# Altium PCB Teensy Troller.PcbDoc
Units mil, origin at the board's own origin, x right, y up, seen from the top; angles counter-clockwise.
Board outline 5602.23 x 4205.03 mil, 2 copper layers (Top Layer, Bottom Layer); 50 components, 50 nets, 258 pads, 37 vias.
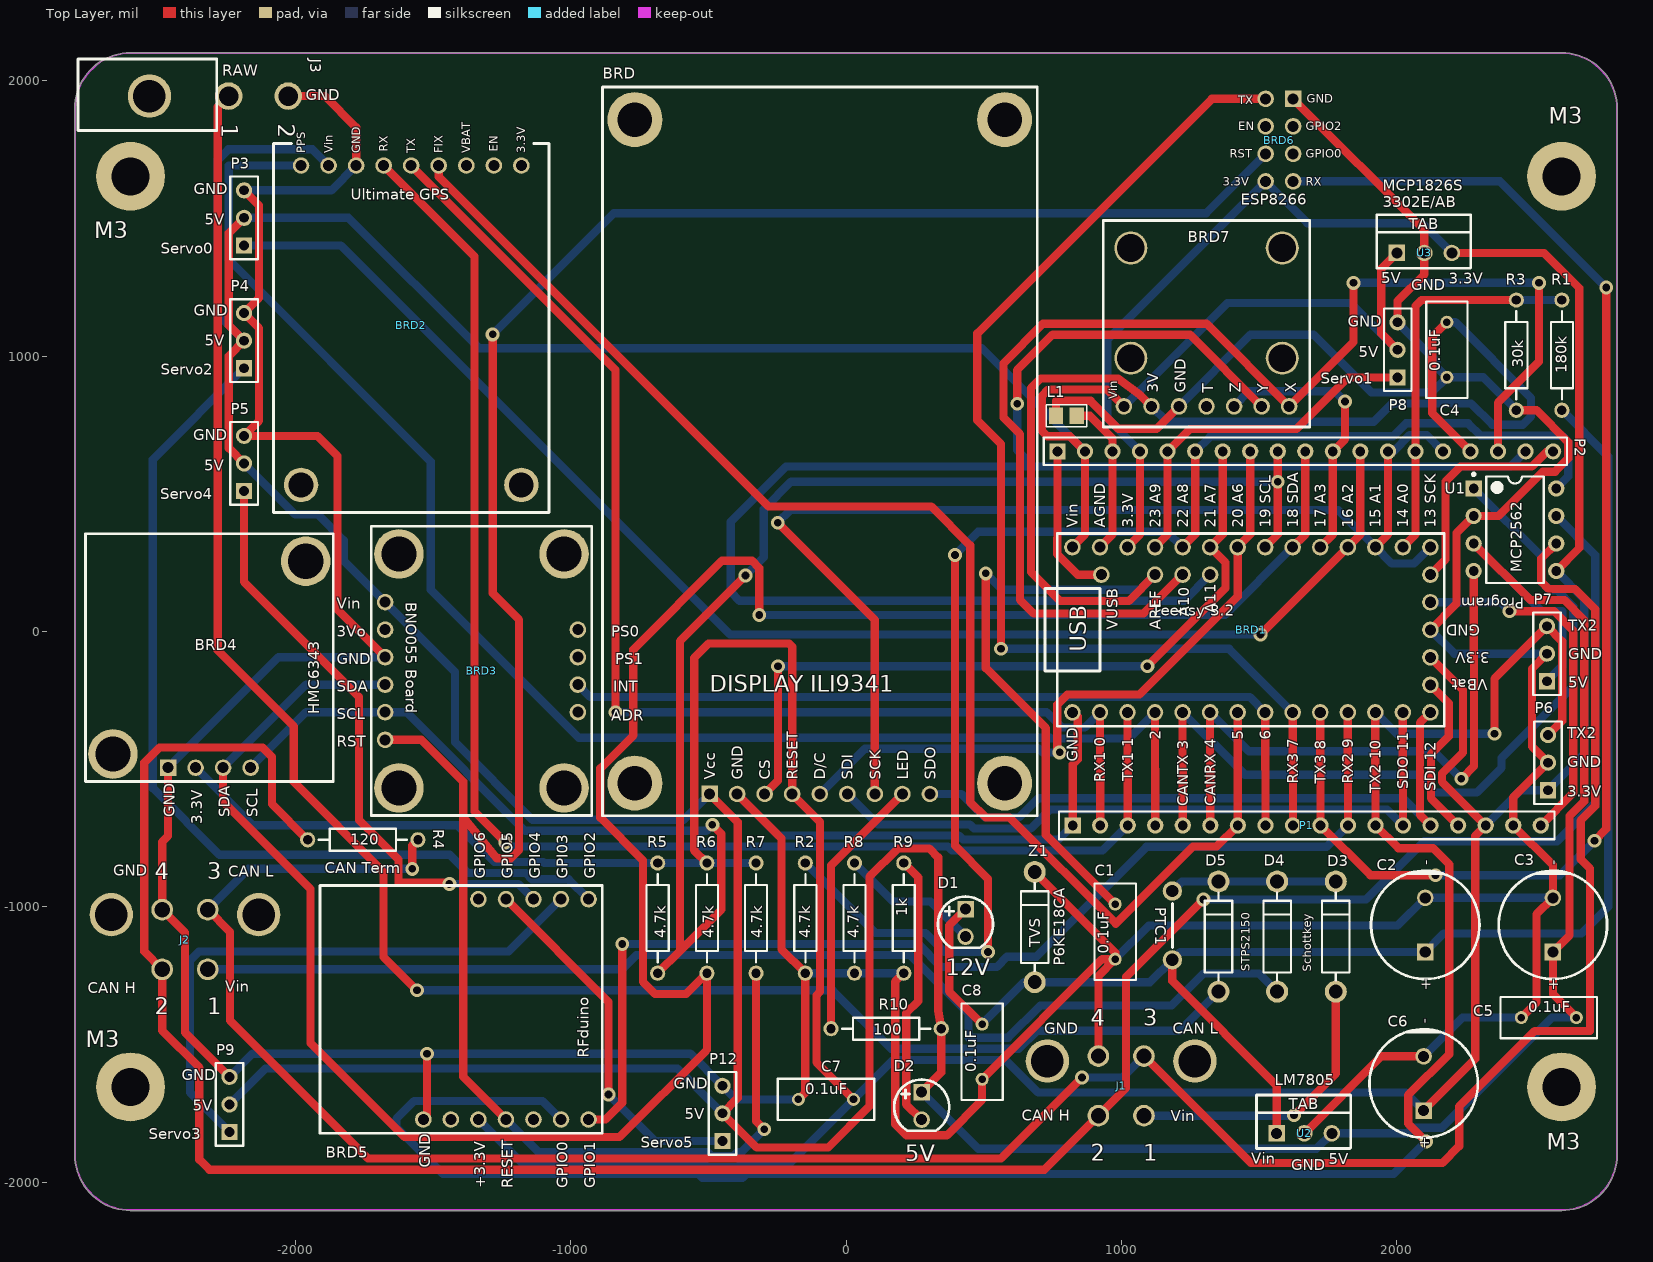
[diagram p0: Top Layer view]
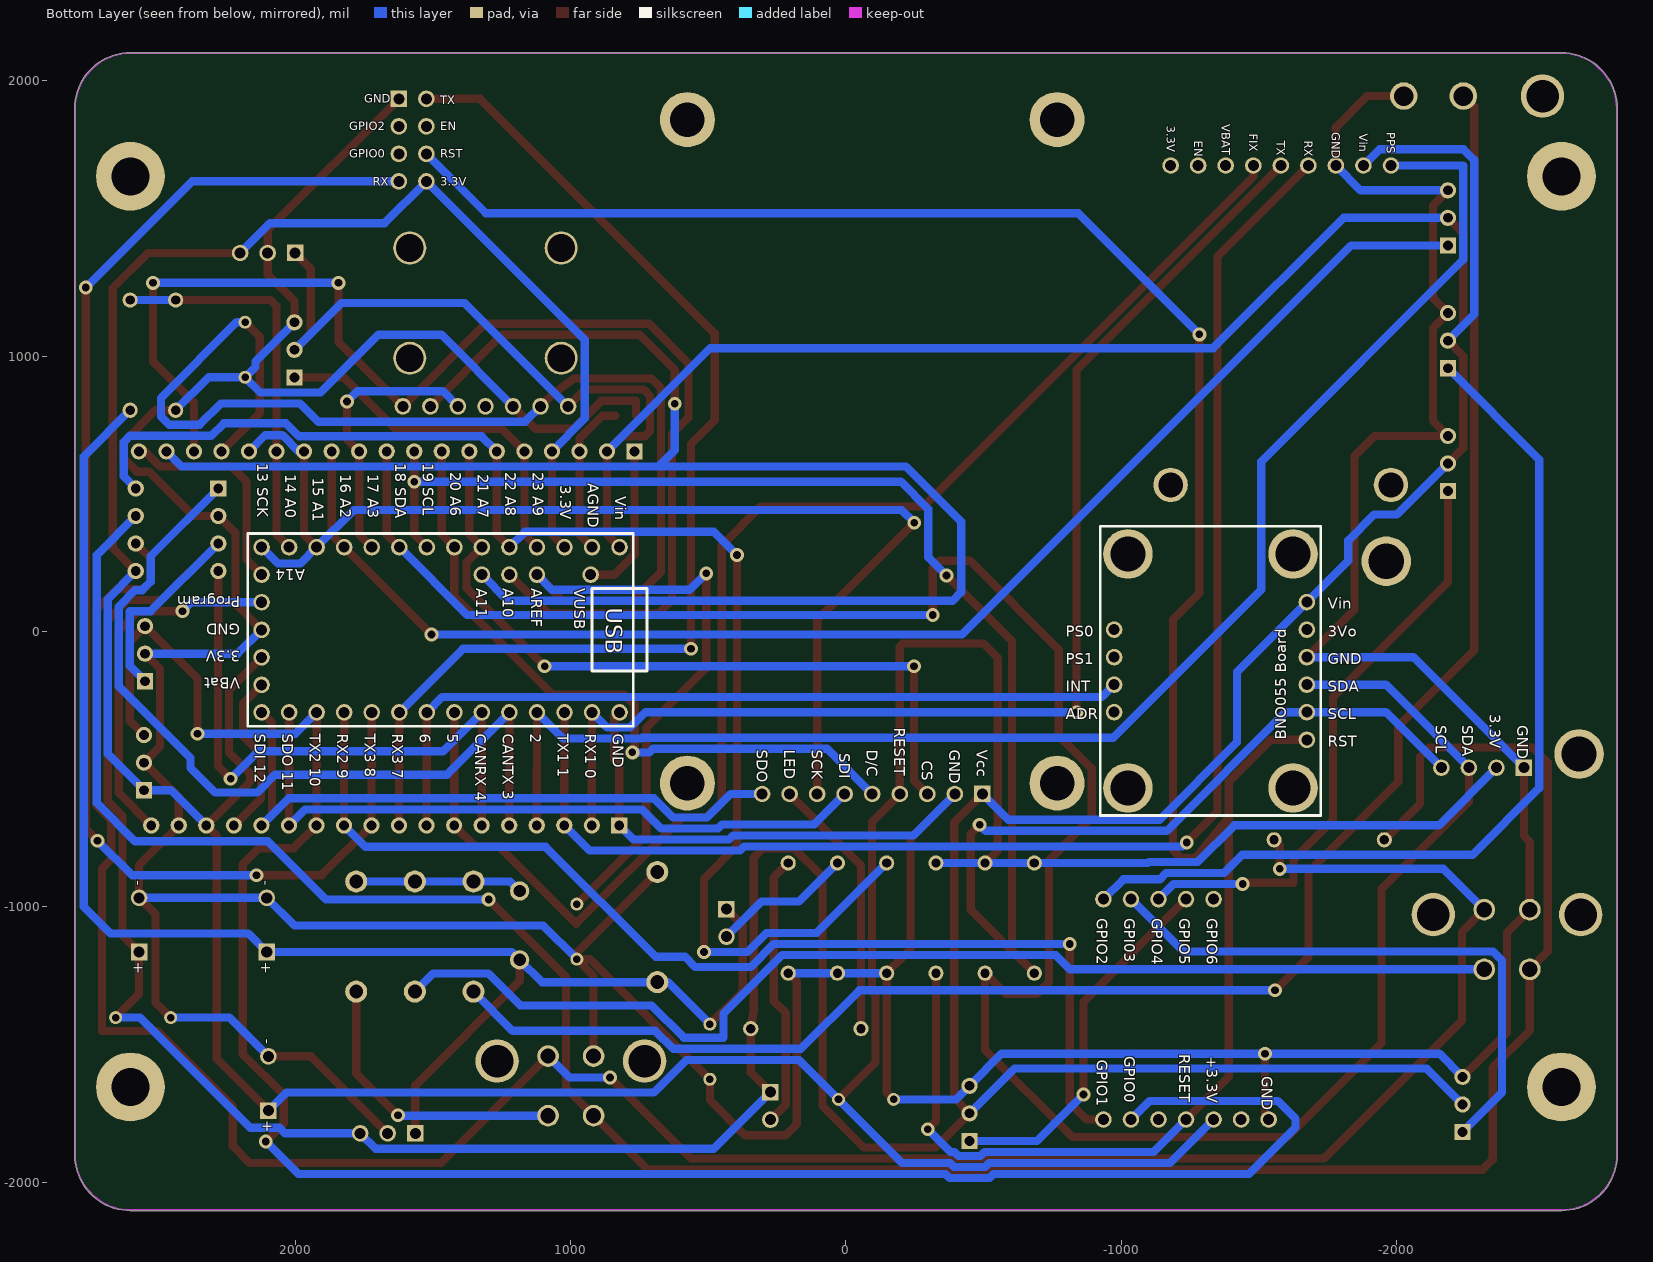
[diagram p1: Bottom Layer view, seen from below]

## Layer stack, top to bottom
Top Solder: solder mask 0.4, Solder Resist, Dk 3.5
Top Layer: signal copper 1.4
Dielectric 1: dielectric 12.6, FR-4, Dk 4.8
Bottom Layer: signal copper 1.4
Bottom Solder: solder mask 0.4, Solder Resist, Dk 3.5

## Board outline
-2801.29,-1900 cw(c-2798.78,-1900) -2801.18,-1899.24 -2801.18,1432.09 cw(c-2798.66,1432.09) -2800.82,1433.37 -2800.82,1899.24 cw(c-2798.43,1900) -2800.94,1900 cw(c-2598.43,1900) -2598.48,2102.51 cw(c-2598.43,1900) -2598.43,2102.51 -2598.43,2102.52 2598.42,2102.52 cw(c2598.42,2100) 2598.48,2102.51 cw(c2598.43,1900) 2800.94,1900 cw(c2798.43,1900) 2800.82,1899.24 2800.82,-1899.24 cw(c2798.43,-1900) 2800.94,-1900 cw(c2598.43,-1900) 2598.43,-2102.51 cw(c2598.43,-2100) 2598.37,-2102.51 -2598.43,-2102.51 cw(c-2598.43,-2100) -2598.6,-2102.51 cw(c-2598.78,-2100) -2598.78,-2102.51 cw(c-2598.78,-1900)

## Design rules (kind name [scope] priority, off if disabled: settings)
Clearance [All] p1: gap=10
HoleSize [All] p1: absolutevalues=TRUE maxlimit=250 minlimit=1 maxpercent=80.000 minpercent=20.000
PolygonConnect [All] p1: connectstyle=Relief reliefconductorwidth=10 reliefentries=4 polygonreliefangle="90 Angle" airgapwidth=10
RoutingVias [All] p1: holewidth=28 width=50 viastyle="Through Hole" minholewidth=28 minwidth=50 maxholewidth=28 maxwidth=50
SilkToSilkClearance [All] p1: silktosilkclearance=1
SolderMaskExpansion [All] p1: expansion=4
Width [All] p1: maxlimit=50 minlimit=20 preferedwidth=30
28 further rules are at their usual default settings.

## Components (designator, comment, footprint, x,y, rotation, side; value= is the part's Value field where it differs from the comment)
BRD "DISPLAY ILI9341" "Display ILI9341" -884.84,-668.31 r0 top
BRD1 "Teensy 3.2" Teensy 2122.05,-293.31 r90 top
BRD2 "Adafruit Ultimate GPS" GPS -1179.13,1772.64 r90 top
BRD3 "BNO055 IMU" "BNO055 Board" -1323.82,-142.72 r270 top
BRD4 "HMC6343 Compass" HMC6343 -1862.2,-544.29 r90 top
BRD5 "RFD22102" "Simblee RFduino Adapter" -935.04,-1771.65 r90 top
BRD6 "ESP8266" ESP8266 1523.62,1935.04 r0 top
BRD7 "AXDL377" "AXDL377 Breakout" 934.06,743.11 r0 top
C1 "0.1uF" RAD-0.2 977.36,-1089.57 r90 top
C2 "330uF" "Elec. Cap 5 x 10mm" 2103.35,-1163.39 r90 top
C3 "330uF" "Elec. Cap 5 x 10mm" 2566.93,-1163.39 r90 top
C4 "0.1uF" RAD-0.2 2182.09,1023.62 r90 top
C5 "0.1uF" RAD-0.2 2552.17,-1401.57 r0 top
C6 "330uF" "Elec. Cap 5 x 10mm" 2097.44,-1739.17 r90 top
C7 "0.1uF" RAD-0.2 -72.83,-1698.82 r0 top
C8 "0.1uF" RAD-0.2 494.09,-1525.59 r90 top
D1 "Green" "5mm Rad LED" 435.04,-1060.04 r0 top
D2 "Red" "5mm Rad LED" 275.59,-1724.41 r0 top
D3 "RK 16V1" DIODE-0.4 1778.54,-1107.28 r90 top
D4 "RK 16V1" DIODE-0.4 1565.45,-1107.28 r90 top
D5 "RK 16V1" DIODE-0.4 1352.36,-1107.28 r90 top
J1 "4 Pos Mini-Fit Jr." "4 POS Vertical MINI-FIT JR" 999.02,-1541.34 r0 top
J2 "4 Pos Mini-Fit Jr." "4 POS Vertical MINI-FIT JR" -2400.59,-1009.84 r0 top
J3 "39-30-1020" "2 pos Mini-Fit Jr. R/A Header" -2242.13,1944.88 r270 top
L1 "80 Ohms" 0805 798.23,783.46 r0 top
P1 "DNP" HDR1X18 822.83,-703.74 r0 top
P2 "DNP" HDR1X19 767.72,654.53 r0 top
P3 "DNP" HDR1X3 -2186.02,1402.56 r90 top
P4 "DNP" HDR1X3 -2186.02,956.69 r90 top
P5 "DNP" HDR1X3 -2186.02,510.83 r90 top
P6 "DNP" HDR1X3 2549.21,-575.79 r90 top
P7 "DNP" HDR1X3 2545.28,-180.12 r90 top
P8 "DNP" HDR1X3 2002.95,923.23 r90 top
P9 "DNP" HDR1X3 -2239.17,-1816.93 r90 top
P12 "DNP" HDR1X3 -448.82,-1849.41 r90 top
PTC1 "0.9 Amp POLYFUSE" PTC 1185.04,-1066.93 r270 top
R1 "180k" Axial-0.4 2599.41,1003.94 r90 top
R2 "4.7k" Axial-0.4 -147.84,-1040.36 r90 top
R3 "30k" Axial-0.4 2434.06,1003.94 r90 top
R4 "120" Axial-0.4 -1754.92,-755.91 r0 top
R5 "4.7k" Axial-0.4 -684.07,-1040.36 r90 top
R6 "4.7k" Axial-0.4 -505.32,-1040.36 r90 top
R7 "4.7k" Axial-0.4 -326.58,-1040.36 r90 top
R8 "4.7k" Axial-0.4 30.9,-1040.36 r90 top
R9 "1k" Axial-0.4 209.65,-1040.35 r90 top
R10 "100" Axial-0.4 145.67,-1441.93 r0 top
U1 "MCP2562" PDIP300-P8 2429.13,370.08 r0 top
U2 "OKI-78SR" 78xx 1563.98,-1821.85 r0 top
U3 "MCP1826S" 78xx 2000,1375 r0 top
Z1 "SMA6J" DIODE-0.4 685.04,-1072.83 r90 top

## Footprints (in the part's own frame and the unit in brackets; to place one, negate y for a bottom-side part, rotate by r counter-clockwise, add the part's x,y. Pads: shape width x height; smd on the part's side, far side on the other; paste and mask are expansions set on the pad)
"2 pos Mini-Fit Jr. R/A Header" [mm] "Molex 2 position Mini-Fit Jr. Right Angle Header with Pegs, Series 5569"
  round 4 hole 3: 0(0,-7.3)
  round 2.54 hole 1.803: 1(0,0) 2(0,5.5)
  silkscreen extent -3.43,-13.9 3.17,-1.1
"4 POS Vertical MINI-FIT JR" [mm] "Vertical Header"
  round 4 hole 3: 0(-6.8,-0.46) 0(6.8,-0.46)
  round 2 hole 1.4: 1(2.1,-5.5) 2(-2.1,-5.5) 3(2.1,0) 4(-2.1,0)
"5mm Rad LED" [mil]
  rect 60x60 hole 40: 1(-1.11,52.05)
  round 60 hole 40: 2(-1.11,-47.95)
  silkscreen extent -101,-88 99,98
78xx [mil] "Voltage regulator based on LM7805"
  rect 60x60 hole 40: 1(0,0)
  round 60 hole 40: 2(100,0) 3(200,0)
  silkscreen extent -73,-55 269,139
0805 [mm]
  rect 1.3x1.5 smd: 1(-0.899,0) 2(1.001,0)
  silkscreen extent -1.8,-1.02 1.9,1.02
"AXDL377 Breakout" [mil] "Adafruit ADXL377 - High-G Triple-Axis Accelerometer (+-200g Analog Out)"
  round 120 hole 100: 0(100,250) 0(100,650) 0(650,250) 0(650,650)
  round 60 hole 40: 1(75,75) 2(175,75) 3(275,75) 4(375,75) 5(475,75) 6(575,75) 7(675,75)
  silkscreen extent 0,0 750,750
Axial-0.4 [mm] "Axial Device, Thru-Hole; 2 Leads; 0.4 in Pin Spacing"
  round 1.4 hole 0.85: 1(-5.08,0) 2(5.08,0)
  silkscreen extent -4.06,-1.02 4.06,1.02
"BNO055 Board" [mil] "Adafruit Breakout Board for the BOSCH Sensortec BNO055"
  round 180 hole 128: 0(-425,300) 0(-425,-300) 0(425,300) 0(425,-300)
  round 60 hole 40: 1(-250,-350) 2(-150,-350) 3(-50,-350) 4(50,-350) 5(150,-350) 6(250,-350) 7(-150,350) 8(-50,350) 9(50,350) 10(150,350)
  silkscreen extent -525,-400 525,400
DIODE-0.4 [mil] "Diode, Thru-Hole; 2 Leads; 0.4 in Pin Spacing"
  round 80 hole 50: 1(-200,0) 2(200,0)
  silkscreen extent -160,-50 160,50
"Display ILI9341" [mil] "Color 320x240 Display, 2.2 inch, ILI9341 Controller,https://www.pjrc.com/store/display_ili9341.html"
  round 200 hole 125: 0(118.11,118.11) 0(118.11,2527.56) 0(1460.63,118.11) 0(1460.63,2527.56)
  rect 60x60 hole 40: 1(389.37,78.74)
  round 60 hole 40: 2(489.37,78.74) 3(589.37,78.74) 4(689.37,78.74) 5(789.37,78.74) 6(889.37,78.74) 7(989.37,78.74) 8(1089.37,78.74) 9(1189.37,78.74)
  silkscreen extent 0,0 1579,2646
"Elec. Cap 5 x 10mm" [mil] "2 lead polarized Radial Capacitor with 5 mm lead spacing and 10 mm diameter can"
  rect 60x60 hole 40: 1(0,0)
  round 60 hole 40: 2(196.85,0)
  silkscreen extent -98,-197 295,197
ESP8266 [mil] "WiFi Module - ESP8266 Sparkfun"
  rect 60x60 hole 40: 1(100,0)
  round 60 hole 40: 2(0,0) 3(100,-100) 4(0,-100) 5(100,-200) 6(0,-200) 7(100,-300) 8(0,-300)
GPS [mil] "Adafruit Ultimate GPS Breakout"
  round 125 hole 90: 0(-1240,0) 0(-1240,800)
  round 60 hole 40: 1(-80,0) 2(-80,100) 3(-80,200) 4(-80,300) 5(-80,400) 6(-80,500) 7(-80,600) 8(-80,700) 9(-80,800)
  silkscreen extent -1340,-100 0,900
HDR1X3 [mm] "Connector; Header; 3 Position"
  rect 1.5x1.5 hole 0.9: 1(0,0)
  round 1.5 hole 0.9: 2(2.54,0) 3(5.08,0)
  silkscreen extent -1.27,-1.27 6.35,1.27
HDR1X18 [mm] "Connector; Header; 18 Position"
  rect 1.5x1.5 hole 0.9: 1(0,0)
  round 1.5 hole 0.9: 2(2.54,0) 3(5.08,0) 4(7.62,0) 5(10.16,0) 6(12.7,0) 7(15.24,0) 8(17.78,0) 9(20.32,0) 10(22.86,0) 11(25.4,0) 12(27.94,0) 13(30.48,0) 14(33.02,0) 15(35.56,0) 16(38.1,0) 17(40.64,0) 18(43.18,0)
  silkscreen extent -1.27,-1.27 44.45,1.27
HDR1X19 [mm] "Connector; Header; 19 Position"
  rect 1.5x1.5 hole 0.9: 1(0,0)
  round 1.5 hole 0.9: 2(2.54,0) 3(5.08,0) 4(7.62,0) 5(10.16,0) 6(12.7,0) 7(15.24,0) 8(17.78,0) 9(20.32,0) 10(22.86,0) 11(25.4,0) 12(27.94,0) 13(30.48,0) 14(33.02,0) 15(35.56,0) 16(38.1,0) 17(40.64,0) 18(43.18,0) 19(45.72,0)
  silkscreen extent -1.27,-1.27 46.99,1.27
HMC6343 [mil] "SparkFun HMC6343 Breakout  SEN-12916"
  round 180 hole 128: 0(100,800) 0(800,100)
  rect 60x60 hole 40: 1(50,600)
  round 60 hole 40: 2(50,500) 3(50,400) 4(50,300)
  silkscreen extent 0,0 900,900
PDIP300-P8 [mm] "DIP, 8-Leads, Row Spacing 7.62mm, Pitch 2.54mm, Body 9.5x6.6mm"
  rect 1.5x1.5 hole 0.9: 1(-3.81,3.81)
  round 1.5 hole 0.9: 2(-3.81,1.27) 3(-3.81,-1.27) 4(-3.81,-3.81) 5(3.81,-3.81) 6(3.81,-1.27) 7(3.81,1.27) 8(3.81,3.81)
  silkscreen extent -3.93,-4.9 2.65,5.23, body extent -3.55,-4.9 3.55,4.9, height 4.32
PTC [mil] "TE RGEF600-2"
  round 70 hole 45: 1(-125,0) 2(125,0)
  silkscreen extent -80,0 80,0
RAD-0.2 [mm] "Radial Cap, Thru-Hole; 2 Leads; 0.2 in Pin Spacing"
  round 1.2 hole 0.7: 1(-2.54,0) 2(2.54,0)
  silkscreen extent -4.44,-1.9 4.45,1.91
"Simblee RFduino Adapter" [mil] "Bluetooth / 802.15.1 Development Tools RFduino BLE 4.0 DIP (Arduino-Compatible)"
  round 60 hole 40: 1(0,0) 2(0,100) 3(0,200) 4(0,300) 5(0,400) 6(0,500) 7(0,600) 8(800,0) 9(800,100) 10(800,200) 11(800,300) 12(800,400)
  silkscreen extent -50,-50 850,975
Teensy [mil] "32 bit Arduino Compatible Microcontroller www.pjrc.com/teensy"
  round 60 hole 40: 1(0,0) 2(0,100) 3(0,200) 4(0,300) 5(0,400) 6(0,500) 7(0,600) 8(0,700) 9(0,800) 10(0,900) 11(0,1000) 12(0,1100) 13(0,1200) 14(0,1300) 15(100,0) 16(200,0) 17(300,0) 18(400,0) 19(500,0) 20(600,0) 21(600,100) 22(600,200) 23(600,300) 24(600,400) 25(600,500) 26(600,600) 27(600,700) 28(600,800) 29(600,900) 30(600,1000) 31(600,1100) 32(600,1200) 33(600,1300) 34(500,1195) 35(500,1000) 36(500,900) 37(500,800)
  silkscreen extent -50,-50 650,1400

## Part data
BRD: library part Display, "Color 320x240 Display, 2.2 inch, ILI9341 Controller https://www.pjrc.com/store/display_ili9341.html"
BRD1: library part Teensy, "32 Bit Arduino-Compatible Microcontroller"
BRD2: library part "GPS - Adafruit"
BRD3: library part "BNO055 Board", "Adafruit BNO055 Sensor Breakout Board"
BRD4: library part HMC6343, "SparkFun HMC6343 Breakout  SEN-12916"
BRD5: library part "Simblee Adapter", "Bluetooth / 802.15.1 Development Tools RFduino BLE 4.0 DIP (Arduino-Compatible)"
BRD6: "Sparkfun ESP8266 Module (WRL-13678)"
BRD7: library part "AXDL377 Breakout", "Adafruit ADXL377 - High-G Triple-Axis Accelerometer (+-200g Analog Out)"
C1 C4 C5 C7 C8: library part Cap, "CAP CER 0.1UF 50V 10% X7R 0603"
C2 C3 C6: library part "SMD Elec", "CAP ALUM 330UF 20% 50V RADIAL"
D1: library part "LED - Green", "LED GREEN DIFFUSED 0805 SMD"
D2: library part "LED - SMD", "LED RED DIFFUSED 0805 SMD"
D3 D4 D5: library part "Schottky Diode", "DIODE SCHOTTKY 60V 2A AXIAL"
J1 J2: library part "4 Pos Header Vert", "CONN HEADER 4POS 4.2MM VERT TIN"
J3: library part "2 Pos Header"
L1: library part "Ferrite Bead", "Ferrite Bead 80ohms 100MHz 5A Monolithic 0805 SMD"
P1: library part "Header 18", "Header, 18-Pin"
P2: library part "Header 19", "Header, 19-Pin"
P3 P4 P5 P6 P7 P8 P9 P12: library part "Header 3", "Header, 3-Pin"
PTC1: library part PTC, "Resettable Fuses - PPTC 60V POLYFUSE .900A RADIAL LEADS"
R1 R3 R4 R8 R9 R10: library part "Chip Resistor", "RES SMD 1K OHM 1% 1/10W 0603"
R2 R5 R6 R7: library part "Chip Resistor", "RES SMD 4.7K OHM 1% 1/8W 0805"
U1: library part MCP2551-I/P, "High-Speed CAN Transceiver, 8-Pin PDIP, Industrial Temperature"
U2: library part 7805, "5V DC/DC Converter (7805 replacement)"
U3: library part 7805, "LDO Voltage Regulators 1A CMOS LDO Vout 3.3V ETR"
Z1: library part "Zener - Bidirectional", "TVS DIODE 15VWM 24.4VC SMA"

## Free pads (board coordinates)
  round 250 hole 137.8: 0(-2598.43,-1653.54) 0(-2598.43,1653.54) 0(2598.42,-1653.54) 0(2598.42,1653.54)

## Via types
v1: diameter 50, hole 28, Top Layer to Bottom Layer, 37 vias

## Nets (pads, with @x,y where several pads share a name; then routed paths per layer and width w, separated by ;. In a path a pad name is that pad's centre, name@x,y a point inside that pad or via, vN(x,y) a via of type N, cw(c..) or ccw(c..) an arc to the next point about the centre after c; other vN are vias at no path point)
3V3: BRD1.16 BRD1.31 BRD4.2 BRD5.5 BRD6.8 BRD.4 C6.1 C7.2 P1.16 P2.4 P6.1 R5.2 R6.2 R7.2 U1.5 U3.3 | length 15866.1
  Top Layer w30: R6.2 -551.43,-794.26 -551.43,-95.54 -499.43,-43.54 -206.43,-43.54 -195.47,-54.5 BRD.4 -94.43,-690.62 -94.43,-1307.54 -107.43,-1320.54 -107.43,-1564.23 C7.2 ; BRD1.31 1067.71,352.36 P2.4 ; C6.1 2284.57,-1552.04 2284.57,-742 P1.16 2164.57,-545.48 2164.57,-514.54 2240.32,-438.8 2240.32,-211.58 BRD1.16 ; U3.3 2535.03,1375 2662.57,1247.46 2662.57,303.52 U1.5
  Bottom Layer w30: BRD4.2 -2153.15,-703.35 -1410.43,-703.35 -1277.12,-836.65 -1100.04,-836.65 -1096.34,-840.36 R5.2 R6.2 R7.2 ; BRD5.5 -1177.15,-1929.54 -519.66,-1929.54 -505.27,-1943.94 -392.37,-1943.94 -377.97,-1929.54 -203.56,-1929.54 C7.2 170.44,-1555.54 579.57,-1555.54 697.57,-1673.54 2031.81,-1673.54 C6.1 ; P2.4 948.57,773.67 948.57,1059.99 BRD6.8 1675.21,1483.46 2091.54,1483.46 U3.3 ; P1.16 2450.79,-575.79 P6.1 2680.57,-444.42 2680.57,118.64 U1.5
5V0: BRD1.33 BRD2.8 BRD3.1 BRD7.1 BRD.1 C3.1 C5.2 D2.1 P2.2 P3.2 P4.2 P5.2 P7.1 P8.2 P9.2 P12.2 R10.2 U1.3 U2.3 U3.1 | length 21828.4
  Top Layer w30: P5.2 -2241.43,666.23 -2241.43,1001.29 P4.2 -2241.43,1112.09 -2241.43,1447.16 P3.2 ; BRD.1 -393.43,-691.62 -393.43,-1694.02 P12.2 -324.49,-1873.74 -64.62,-1873.74 85.57,-1723.54 85.57,-890.05 188.08,-787.54 302.57,-787.54 334.57,-819.54 334.57,-1376.54 R10.2 345.67,-1601.16 D2.1 ; BRD1.33 867.71,352.36 P2.2 813.19,709.05 730.98,709.05 711.57,728.46 711.57,856.46 734.04,878.92 948.24,878.92 BRD7.1 ; U3.1 1943.57,1318.58 1943.57,1082.61 P8.2 ; U1.3 2484.8,114.41 2608.62,114.41 2680.57,42.46 2680.57,-616.92 2627.57,-669.92 2627.57,-1102.74 C3.1 2566.93,-1316.34 C5.2
  Bottom Layer w30: P9.2 -2108.79,-1586.54 -611.69,-1586.54 P12.2 ; P5.2 -2000.65,425.46 -1918.43,425.46 -1824.43,331.46 -1824.43,257.89 BRD3.1 -1420.43,-146.11 -1420.43,-401.54 -1138.43,-683.54 -589.45,-683.54 BRD.1 ; P4.2 -2281.43,1152.09 -2281.43,1713.46 -2243.43,1751.46 -1937.95,1751.46 BRD2.8 ; P3.2 -1806.53,1502.56 -1333.43,1029.46 492.78,1029.46 P2.2 ; D2.1 479.67,-1877.54 1708.28,-1877.54 U2.3 2036.59,-1821.85 2056.95,-1801.49 2163.63,-1801.49 2563.54,-1401.58 C5.2 ; BRD7.1 1384.4,1193.46 1832.72,1193.46 P8.2 ; U1.3 2524.8,74.41 2600.57,74.41 2600.57,-124.82 P7.1
12V0: C2.1 C8.2 D1.1 PTC1.2 R1.1 U2.1 Z1.1 | length 5601.7
  Top Layer w30: D1.1 374.57,-1067.34 374.57,-1306.07 C8.2 ; PTC1.2 1185.04,-1268.54 1563.98,-1647.48 U2.1
  Bottom Layer w30: C8.2 646.85,-1272.84 Z1.1 1104.13,-1272.84 PTC1.2 1213.58,-1163.39 C2.1 2170.19,-1096.54 2670.57,-1096.54 2767.57,-999.54 2767.57,635.77 R1.1
CAN1H: J1.2 J2.2 R4.1 U1.7 | length 9354
  Top Layer w30: R4.1 -2084.43,-626.4 -2084.43,-454.54 -2118.43,-420.54 -2493.43,-420.54 -2548.43,-475.54 -2548.43,-1161.22 J2.2 -2483.27,-1448.7 -2348.43,-1583.54 -2348.43,-1917.54 -2312.23,-1953.74 720.47,-1953.74 J1.2 1016.57,-1657.64 1016.57,-1253.54 v1(1297.57,-972.54)
  Bottom Layer w30: v1(1297.57,-972.54) 1888.57,-972.54 2099.57,-761.54 2581.57,-761.54 2720.57,-622.54 2720.57,278.64 U1.7
CAN1L: J1.3 J2.3 R4.2 U1.6 | length 9065.2
  Top Layer w30: J2.3 -2237.43,-1090.33 -2237.43,-1412.54 -1736.23,-1913.74 562.38,-1913.74 v1(856.57,-1619.54) ; v1(-1575.43,-861.54) -1575.43,-776.41 R4.2 ; J1.3 1469.9,-1929.54 2165.57,-1929.54 2226.57,-1868.54 2226.57,-1724.54 2500.57,-1450.54 2701.57,-1450.54 2701.57,-860.54 2667.57,-826.54 2667.57,-686.49 2720.57,-633.49 2720.57,81.46 2647.57,154.46 2551.57,154.46 2524.57,181.46 2524.57,265.52 U1.6
  Bottom Layer w30: J2.3 -2169.62,-861.54 v1(-1575.43,-861.54) ; v1(856.57,-1619.54) 1003.49,-1619.54 J1.3
GND: BRD1.14 BRD1.17 BRD2.7 BRD3.3 BRD4.1 BRD5.7 BRD6.1 BRD7.3 BRD.2 C1.1 C2.2 C3.2 C4.1 C5.1 C6.2 C7.1 C8.1 J1.4 J2.4 J3.2 L1.1 P1.1 P1.17 P3.3 P4.3 P5.3 P6.2 P7.2 P8.3 P9.3 P12.3 R2.1 R3.1 R8.1 R9.1 U1.2 U2.2 U3.2 Z1.2 | length 22686.1
  Top Layer w30: BRD4.1 -2462.21,-742.48 -2483.27,-763.54 J2.4 -2400.43,-1092.68 -2400.43,-1455.68 P9.3 ; P3.3 -2131.43,1547.96 -2131.43,1211.29 P4.3 -2131.43,1102.09 -2131.43,765.42 P5.3 -1919.8,710.83 -1846.43,637.46 -1846.43,79.89 BRD3.3 ; J3.2 -1892.56,1944.88 -1779.13,1831.46 BRD2.7 ; BRD5.7 -1521.43,-1758.04 v1(-1521.43,-1532.54) ; BRD.2 -234.43,-750.62 -234.43,-1153.77 R2.1 -147.84,-1673.82 C7.1 ; R9.1 178.57,-1271.43 178.57,-1788.54 219.38,-1829.35 365.77,-1829.35 494.09,-1701.02 C8.1 930.12,-1189.57 C1.1 ; Z1.2 977.36,-1165.16 C1.1 ; L1.1 762.83,837.99 888.22,837.99 989.76,736.46 1127.4,736.46 BRD7.3 ; BRD1.14 822.05,-308.31 841.25,-308.31 841.25,-464.35 822.83,-482.77 P1.1 ; J1.4 916.34,-1250.59 C1.1 ; BRD6.1 2100,1458.66 U3.2 2100,1297.5 2002.95,1200.46 P8.3 ; U2.2 1943.5,-1542.32 C6.2 ; BRD1.17 2217.05,101.69 2217.05,357.99 U1.2 2369.39,420.08 2530.3,580.99 2575.11,580.99 2622.57,628.46 2622.57,688.46 2507.09,803.94 R3.1 ; C5.1 2507.57,-1346.17 2507.57,-1025.89 C3.2 2566.93,-847.83 P1.17 2422.83,-602.16 P6.2 2490.57,-417.15 2490.57,-134.82 P7.2
  Bottom Layer w30: BRD4.1 -2060.63,-92.72 BRD3.3 ; P9.3 -2154.79,-1532.54 v1(-1521.43,-1532.54) -565.69,-1532.54 P12.3 -399.41,-1698.82 C7.1 ; P3.3 -1869.21,1602.56 BRD2.7 ; BRD.2 -244.67,-740.37 409.57,-740.37 424.4,-755.2 771.38,-755.2 P1.1 ; R2.1 R8.1 R9.1 ; C1.1 1099.38,-1067.54 2002.34,-1067.54 C2.2 2334.57,-966.54 C3.2 ; BRD7.3 1469.05,1078.11 1697.92,1078.11 1907.57,868.46 2126.92,868.46 C4.1 ; P8.3 2144.41,981.77 2144.41,961.3 C4.1 ; C6.2 2238.19,-1401.58 C5.1 ; BRD1.17 2208.86,-80.12 P7.2 ; R3.1 2314.37,923.62 C4.1
NetBRD1_1: BRD1.1 BRD.9 P1.14 | length 2365.1
  Top Layer w30: BRD1.1 2084.57,-330.78 2084.57,-665.48 P1.14
  Bottom Layer w30: BRD.9 418.77,-589.57 504.4,-675.2 627.56,-675.2 697.22,-605.54 2024.64,-605.54 P1.14
NetBRD1_2: BRD1.2 BRD.6 P1.13 | length 2534.1
  Top Layer w30: BRD1.2 2022.05,-498.76 2022.83,-499.54 P1.13
  Bottom Layer w30: BRD.6 115.33,-700.37 449.57,-700.37 464.4,-715.2 671.13,-715.2 740.79,-645.54 1964.64,-645.54 P1.13
NetBRD1_3: BRD1.3 BRD5.2 P1.12 P6.3 P7.3 | length 7759.2
  Top Layer w30: BRD1.3 1922.05,-498.76 1922.83,-499.54 P1.12 2005.64,-786.54 2131.57,-786.54 2190.57,-845.54 2190.57,-1534.54 2041.57,-1683.54 2041.57,-1786.54 v1(2106.57,-1851.54) ; v1(2354.57,-370.54) 2354.57,-170.82 P7.3 2600.57,-35.42 2600.57,-324.42 P6.3
  Bottom Layer w30: BRD5.2 -1102.15,-1704.54 -1568.43,-1704.54 -1632.43,-1768.54 -1632.43,-1800.54 -1463.43,-1969.54 -536.23,-1969.54 -521.84,-1983.94 -375.8,-1983.94 -361.4,-1969.54 1988.57,-1969.54 v1(2106.57,-1851.54) ; BRD1.3 1999.28,-370.54 v1(2354.57,-370.54)
NetBRD1_4: BRD1.4 BRD5.1 P1.11 | length 4017.1
  Top Layer w30: BRD5.1 -873.54,-1771.65 -812.43,-1710.54 v1(-812.43,-1134.54) ; BRD1.4 1822.05,-498.76 1822.83,-499.54 P1.11
  Bottom Layer w30: v1(-812.43,-1134.54) 262.57,-1134.54 345.57,-1217.54 547.57,-1217.54 584.57,-1180.54 691.57,-1180.54 1090.57,-781.54 1745.03,-781.54 P1.11
NetBRD1_5: BRD1.5 BRD6.7 P1.10 | length 4855.6
  Top Layer w30: BRD1.5 1722.05,-498.76 1722.83,-499.54 P1.10 1903.64,-884.54 v1(2140.57,-884.54) ; v1(2717.57,-759.54) 2760.57,-716.54 v1(2760.57,1249.46)
  Bottom Layer w30: BRD6.7 2374.99,1635.04 v1(2760.57,1249.46) ; v1(2140.57,-884.54) 2592.57,-884.54 v1(2717.57,-759.54)
NetBRD1_6: BRD1.6 BRD6.2 P1.9 | length 4147.1
  Top Layer w30: v1(562.57,-62.54) 562.57,681.13 476.57,767.13 476.57,1083.23 1328.39,1935.04 BRD6.2 ; BRD1.6 1622.05,-498.76 1622.83,-499.54 P1.9
  Bottom Layer w30: v1(562.57,-62.54) 1391.28,-62.54 BRD1.6
NetBRD1_7: BRD1.7 BRD3.9 P1.8 | length 2948.3
  Top Layer w30: BRD1.7 1522.05,-498.76 1522.83,-499.54 P1.8
  Bottom Layer w30: BRD3.9 -928.99,-237.54 1466.28,-237.54 BRD1.7
NetBRD1_8: BRD1.8 BRD2.4 P1.7 | length 5170.5
  Top Layer w30: BRD2.4 -1479.13,1652.16 -281.21,454.24 309.79,454.24 450.79,313.24 450.79,-618.54 507.44,-675.2 594.23,-675.2 979.57,-1060.54 1259.57,-780.54 1346.03,-780.54 P1.7 1422.83,-499.54 1422.05,-498.76 BRD1.8
NetBRD1_9: BRD1.9 P1.6 U1.4 | length 2197.3
  Top Layer w30: BRD1.9 1322.05,-498.76 1322.83,-499.54 P1.6 ; v1(2234.57,-534.54) 2280.32,-488.8 2280.32,-74.29 2279.13,-73.1 U1.4
  Bottom Layer w30: BRD1.9 1463.28,-434.54 2134.57,-434.54 v1(2234.57,-534.54)
NetBRD1_10: BRD1.10 P1.5 U1.1 | length 3014.5
  Top Layer w30: BRD1.10 1222.05,-498.76 1222.83,-499.54 P1.5
  Bottom Layer w30: BRD1.10 1448.28,-519.54 2072.57,-519.54 2137.57,-584.54 2290.57,-584.54 2380.57,-494.54 2380.57,-458.74 2640.57,-198.74 2640.57,91.46 2581.57,150.46 2555.57,150.46 2524.57,181.46 2524.57,274.64 U1.1
NetBRD1_11: BRD1.11 BRD2.9 P1.4 | length 5410.6
  Top Layer w30: BRD1.11 1122.05,-498.76 1122.83,-499.54 P1.4
  Bottom Layer w30: BRD2.9 -2241.24,1692.64 -2241.43,1692.46 -2241.43,1350.46 -1508.43,617.46 -1508.43,152.46 -970.77,-385.2 740.79,-385.2 743.9,-388.31 1027.05,-388.31 BRD1.11
NetBRD1_12: BRD1.12 BRD2.6 P1.3 | length 5362.3
  Top Layer w30: BRD2.6 -1349.43,1362.93 -1349.43,-653.54 v1(-1237.43,-765.54) ; BRD1.12 1022.05,-498.76 1022.83,-499.54 P1.3
  Bottom Layer w30: v1(-1237.43,-765.54) -1222.6,-780.37 369.57,-780.37 384.4,-795.2 931.38,-795.2 P1.3
NetBRD1_13: BRD1.13 BRD2.5 P1.2 | length 4508.5
  Top Layer w30: BRD2.5 -837.43,950.93 v1(-837.43,-292.54) ; BRD1.13 922.05,-498.76 922.83,-499.54 P1.2
  Bottom Layer w30: v1(-837.43,-292.54) 728.13,-292.54 783.9,-348.31 867.05,-348.31 BRD1.13
NetBRD1_15: BRD1.15 P1.15 | length 605.2
  Top Layer w30: BRD1.15 2188.57,-259.84 2188.57,-380.54 2124.57,-444.54 2124.57,-605.48 P1.15
NetBRD1_18: BRD1.18 P1.18 | length 1317.8
  Top Layer w30: v1(2409.57,74.41) 2570.62,74.41 2640.57,4.46 2640.57,-586 P1.18
  Bottom Layer w30: BRD1.18 2377.29,106.69 v1(2409.57,74.41)
NetBRD1_19: BRD1.19 P2.19 | length 797.4
  Top Layer w30: BRD1.19 2177.05,261.69 2177.05,545.47 2231.57,600 2490.3,600 2544.83,654.53 P2.19
NetBRD1_20: BRD1.20 BRD1.22 BRD.7 P2.13 P2.15 | length 4241.4
  Top Layer w30: v1(-248.43,395.46) 104.53,42.5 BRD.7 ; BRD1.22 1967.71,352.36 P2.13
  Bottom Layer w30: v1(-248.43,395.46) -202.19,441.69 1787.05,441.69 BRD1.22 1981.28,247.46 2062.81,247.46 BRD1.20 ; P2.13 1987.64,654.53 2046.57,713.46 2108.78,713.46 P2.15
NetBRD1_21: BRD1.21 P2.14 R1.2 R3.2 | length 1435.1
  Top Layer w30: BRD1.21 2067.71,352.36 P2.14 2067.71,1182.08 2089.57,1203.94 R3.2
  Bottom Layer w30: R3.2 R1.2
NetBRD1_23: BRD1.23 P2.12 P3.1 | length 5091.5
  Top Layer w30: v1(1504.81,-10.54) BRD1.23 1867.71,352.36 P2.12
  Bottom Layer w30: P3.1 -1834.53,1402.56 -421.43,-10.54 v1(1504.81,-10.54)
NetBRD1_24: BRD1.24 BRD7.5 P2.11 | length 1006.7
  Top Layer w30: BRD1.24 1767.71,352.36 P2.11 1811.57,698.39 v1(1811.57,835.46)
  Bottom Layer w30: BRD7.5 1464.05,873.11 1773.92,873.11 v1(1811.57,835.46)
NetBRD1_25: BRD1.25 BRD3.4 BRD4.3 P2.10 R6.1 | length 8615.7
  Top Layer w30: BRD4.3 -2262.21,-616.76 -1944.43,-934.54 -1944.43,-1494.54 -1603.43,-1835.54 -822.43,-1835.54 -505.33,-1518.44 R6.1 -580.51,-1315.54 -693.43,-1315.54 -737.43,-1271.54 -737.43,-830.54 -892.43,-675.54 -892.43,-496.54 -772.43,-376.54 -772.43,-64.54 -450.43,257.46 -341.43,257.46 -315.43,231.46 v1(-315.43,60.46) ; BRD1.25 1667.71,352.36 P2.10
  Bottom Layer w30: BRD4.3 -1960.63,-192.72 BRD3.4 ; v1(-315.43,60.46) 1375.81,60.46 BRD1.25
NetBRD1_26: BRD1.26 BRD3.5 BRD4.4 P2.9 R5.1 | length 6601.4
  Top Layer w30: R5.1 -603.43,-1159.71 ; v1(-485.43,-701.54) -452.77,-734.2 -452.77,-1009.05 -603.43,-1159.71 ; v1(-365.43,203.46) -603.43,-34.54 -603.43,-1159.71 ; BRD1.26 1567.71,352.36 v1(1567.71,544.46) P2.9
  Bottom Layer w30: BRD4.4 -1960.63,-292.72 BRD3.5 -1596.25,-292.72 -1165.43,-723.54 -507.43,-723.54 v1(-485.43,-701.54) ; v1(-365.43,203.46) -298.43,270.46 -298.43,445.46 -199.43,544.46 v1(1567.71,544.46)
NetBRD1_27: BRD1.27 BRD.5 P2.8 | length 2485
  Top Layer w30: v1(775.57,-438.54) 767.05,-430.02 767.05,-265.07 803.42,-228.69 1065.42,-228.69 1422.05,127.93 BRD1.27 1467.71,352.36 P2.8
  Bottom Layer w30: BRD.5 68.9,-425.2 700.57,-425.2 713.92,-438.54 v1(775.57,-438.54)
NetBRD1_28: BRD1.28 BRD.3 P2.7 | length 2765
  Top Layer w30: BRD.3 -247.42,-541.52 v1(-247.42,-125.54) ; v1(1094.27,-125.54) 1377.57,157.76 1377.57,251.16 BRD1.28 1367.71,352.36 P2.7
  Bottom Layer w30: v1(-247.42,-125.54) v1(1094.27,-125.54)
NetBRD1_29: BRD1.29 P2.6 R2.2 U1.8 | length 5151.8
  Top Layer w30: v1(395.57,278.46) 395.57,-777.54 515.57,-897.54 v1(515.57,-1163.54) ; BRD1.29 1267.71,352.36 P2.6
  Bottom Layer w30: R2.2 106.35,-1094.54 288.57,-1094.54 357.57,-1163.54 v1(515.57,-1163.54) ; v1(395.57,278.46) 479.57,362.46 1166.28,362.46 BRD1.29 ; P2.6 1322.64,709.46 1986,709.46 2033.13,756.59 2259.21,756.59 2304.42,711.38 2599.65,711.38 2622.57,688.46 2622.57,563.52 U1.8
NetBRD1_30: BRD1.30 P2.5 P8.1 | length 1313.3
  Top Layer w30: BRD1.30 1167.71,352.36 P2.5 1248.64,735.46 1635.57,735.46 1823.35,923.23 P8.1
NetBRD1_32: BRD1.32 L1.2 P2.3 | length 578
  Top Layer w30: L1.2 886.18,783.46 967.71,701.93 P2.3 967.71,352.36 BRD1.32
NetBRD1_34: BRD1.34 P2.1 | length 565
  Top Layer w30: P2.1 767.71,339.46 766.57,338.32 766.57,281.46 841.34,206.69 BRD1.34
NetBRD1_35: BRD1.35 BRD7.2 C1.2 C4.2 P2.16 | length 6256.8
  Top Layer w30: v1(507.57,211.46) 507.57,-132.54 725.57,-350.54 725.57,-737.78 C1.2 ; BRD7.2 1065.71,861.46 987.5,919.46 706.57,919.46 671.57,884.46 671.57,216.46 776.57,111.46 1026.81,111.46 BRD1.35 ; C4.2 2128.57,1070.11 2128.57,793.67 P2.16
  Bottom Layer w30: v1(507.57,211.46) 567.34,151.69 1067.05,151.69 BRD1.35 ; BRD7.2 1164.71,762.46 1916.57,762.46 1982.57,828.46 2269.7,828.46 2346.78,751.38 2457.5,751.38 2487.57,781.46 2487.57,848.46 2212.41,1123.62 C4.2
NetBRD1_36: BRD1.36 BRD7.7 P2.17 | length 4667.4
  Top Layer w30: BRD1.36 1080.81,65.46 681.57,65.46 631.57,115.46 631.57,717.13 571.57,777.13 571.57,974.46 715.23,1118.11 1309.05,1118.11 BRD7.7 1842.57,1051.63 v1(1842.57,1266.46) ; P2.17 2367.71,831.46 2516.57,980.32 v1(2516.57,1266.46)
  Bottom Layer w30: v1(1842.57,1266.46) v1(2516.57,1266.46)
NetBRD1_37: BRD1.37 BRD7.6 P2.18 | length 6464.1
  Top Layer w30: v1(621.57,827.46) 621.57,949.46 750.23,1078.11 1249.05,1078.11 BRD7.6
  Bottom Layer w30: v1(621.57,827.46) 621.57,659.46 681.57,599.46 ; BRD1.37 1227.05,111.69 -386.66,111.69 -418.43,143.46 -418.43,399.46 -218.43,599.46 681.57,599.46 ; P2.18 2412.64,599.46 681.57,599.46
NetBRD3_6: BRD3.6 BRD5.4 BRD6.6 R7.1 | length 8525.7
  Top Layer w30: BRD3.6 -1542.25,-392.72 -1390.43,-544.54 -1390.43,-674.54 ; v1(-1283.43,1079.46) -1283.43,139.46 -1187.43,43.46 -1187.43,-793.54 -1216.43,-822.54 -1268.43,-822.54 -1390.43,-674.54 ; BRD5.4 -1390.43,-1616.27 -1390.43,-674.54 ; R7.1 -326.58,-1777.95 v1(-297.21,-1807.32)
  Bottom Layer w30: v1(-1283.43,1079.46) -843.43,1519.46 1308.04,1519.46 BRD6.6 ; BRD5.4 -1117.15,-1889.54 -503.1,-1889.54 -488.7,-1903.94 -408.93,-1903.94 -394.54,-1889.54 -379.43,-1889.54 v1(-297.21,-1807.32)
NetBRD5_8: BRD5.8 P4.1 | length 3411.9
  Bottom Layer w30: P4.1 -2517.43,625.29 -2517.43,-568.54 -2275.41,-810.56 -1439.05,-810.56 -1372.95,-876.65 -1162.93,-876.65 -1140.04,-899.54 -1007.15,-899.54 BRD5.8
NetBRD5_9: BRD5.9 P9.1 | length 2122
  Bottom Layer w30: P9.1 -2382.43,-1673.68 -2382.43,-1193.54 -2350.43,-1161.54 -1224.93,-1161.54 BRD5.9
NetBRD5_10: BRD5.10 P5.1 | length 2170
  Top Layer w30: P5.1 -2186.02,181.05 -1768.43,-236.54 -1768.43,-684.54 -1625.66,-827.31 -1625.66,-911.54 -1445.54,-911.54 v1(-1440.43,-916.65)
  Bottom Layer w30: v1(-1440.43,-916.65) -1190.04,-916.65 BRD5.10
NetBRD5_11: BRD5.11 P12.1 | length 1346.8
  Top Layer w30: BRD5.11 -862.43,-1344.27 v1(-862.43,-1680.54)
  Bottom Layer w30: v1(-862.43,-1680.54) -693.56,-1849.41 P12.1
NetBRD7_4: BRD7.4
NetBRD_8: BRD.8 R10.1 | length 959.6
  Top Layer w30: R10.1 -54.33,-848.42 BRD.8
NetD1_2: D1.2 R8.2 | length 513.9
  Bottom Layer w30: R8.2 171.01,-980.46 306.41,-980.46 D1.2
NetD2_2: D2.2 R9.2 | length 995.3
  Top Layer w30: R9.2 262.57,-893.29 262.57,-1341.54 218.57,-1385.54 218.57,-1716.45 D2.2
NetD3_2: D3.2 D4.2 D5.2 PTC1.1 | length 607.9
  Bottom Layer w30: PTC1.1 1219.68,-907.28 D5.2 D4.2 D3.2
RAW0: D3.1 J1.1 | length 1057.6
  Top Layer w30: v1(1626.57,-1756.54) 1778.54,-1604.57 D3.1
  Bottom Layer w30: J1.1 1625.24,-1757.87 v1(1626.57,-1756.54)
RAW1: D4.1 J2.1 | length 4203.8
  Bottom Layer w30: J2.1 -813.26,-1226.38 -761.43,-1174.54 231.57,-1174.54 444.57,-1387.54 444.57,-1474.54 588.57,-1474.54 705.57,-1357.54 1182.57,-1357.54 1298.57,-1241.54 1499.71,-1241.54 D4.1
RAW2: D5.1 J3.1 | length 6647.6
  Top Layer w30: J3.1 -2281.43,1905.58 -2281.43,-68.54 -2005.53,-344.44 -2005.53,-546.44 -1679.43,-872.54 -1679.43,-1181.54 v1(-1558.43,-1302.54)
  Bottom Layer w30: v1(-1558.43,-1302.54) -48.43,-1302.54 163.57,-1514.54 627.57,-1514.54 692.57,-1449.54 1210.1,-1449.54 D5.1
pads on no net: BRD2.0 BRD2.1 BRD2.2 BRD2.3 BRD3.0 BRD3.2 BRD3.7 BRD3.8 BRD3.10 BRD4.0 BRD5.3 BRD5.6 BRD5.12 BRD6.3 BRD6.4 BRD6.5 BRD7.0 BRD.0 J1.0 J2.0 J3.0

## Keep-outs
Keep-Out Layer:
  lines w5: -2798.78,-1900 ccw(c-2598.78,-1900) -2598.78,-2100 ; -2798.66,-1900 -2798.66,1432.09 ; -2798.43,1900 cw(c-2598.43,1900) -2598.43,2100 2598.42,2100 cw(c2598.43,1900) 2798.43,1900 ; -2798.31,1420 -2798.31,1900 ; -2598.43,-2100 2598.42,-2100 ccw(c2598.43,-1900) 2798.43,-1900 ; 2798.31,-1900 2798.31,1420 2798.31,1900

## Silkscreen, mask and mechanical layers (free items; w line width, h text height)
Top Overlay:
  text "RAW" at -2265.87,2017.72 h40
  text "GND" at -1962.72,1929.13 h40
  text "M3" at 2551.18,1844.49 h60
  text "GND" at -2368.23,1587.6 h40
  text "Ultimate GPS" at -1798.23,1568.9 h40
  text "MCP1826S / 3302E/AB" at 1949.8,1540.35 h40
  text "5V" at -2328.24,1477.36 h40
  text "M3" at -2729.33,1428.15 h60
  text "Servo0" at -2488.19,1373.03 h40
  text "GND" at -2368.23,1147.64 h40
  text "GND" at 1822.72,1107.28 h40
  text "5V" at -2328.24,1037.4 h40
  text "5V" at 1862.7,997.05 h40
  text "30k" at 2458.66,958.66 h40 r90
  text "0.1uF" at 2157.48,945.87 h40 r90
  text "180k" at 2617.13,937.99 h40 r90
  text "Servo2" at -2488.19,933.07 h40
  text "Servo1" at 1723.43,899.61 h40
  text "GND" at -2370.2,694.88 h40
  text "5V" at -2330.21,584.65 h40
  text "Servo4" at -2490.16,480.31 h40
  text "MCP2562" at 2453.74,215.55 h40 r90
  text "Teensy 3.2" at 1110.24,58.07 h40
  text "TX2" at 2622.05,3.94 h40
  text "GND" at 2622.05,-100.39 h40
  text "5V" at 2622.05,-204.72 h40
  text "TX2" at 2619.09,-387.8 h40
  text "GND" at 2619.09,-492.13 h40
  text "3.3V" at 2619.09,-600.39 h40
  text "120" at -1800.2,-774.61 h40
  text "CAN Term" at -1892.72,-877.95 h40
  text "GND" at -2660.43,-885.83 h40
  text "CAN L" at -2244.09,-890.75 h40
  text "1k" at 221.46,-1033.46 h40 r90
  text "4.7k" at -655.51,-1113.44 h40 r90
  text "4.7k" at -480.12,-1113.44 h40 r90
  text "4.7k" at -304.72,-1113.44 h40 r90
  text "4.7k" at -129.33,-1113.44 h40 r90
  text "4.7k" at 46.06,-1113.44 h40 r90
  text "TVS" at 704.72,-1146.65 h40 r90
  text "0.1uF" at 954.72,-1169.29 h40 r90
  text "P6KE18CA" at 794.29,-1212.6 h40 r90
  text "STPS2150" at 1465.55,-1233.27 h30 r90
  text "Schottkey" at 1689.96,-1234.25 h30 r90
  text "12V" at 362.2,-1248.03 h60
  text "Vin" at -2254.92,-1307.09 h40
  text "CAN H" at -2753.94,-1312.99 h40
  text "0.1uF" at 2477.36,-1382.87 h40
  text "GND" at 719.49,-1460.63 h40
  text "CAN L" at 1187.01,-1460.63 h40
  text "100" at 99.41,-1463.58 h40
  text "M3" at -2761.81,-1508.86 h60
  text "0.1uF" at 472.44,-1599.41 h40 r90
  text "GND" at -2411.53,-1628.94 h40
  text "LM7805" at 1557.09,-1647.64 h40
  text "GND" at -626.1,-1660.43 h40
  text "0.1uF" at -147.64,-1680.12 h40
  text "5V" at -2371.55,-1739.17 h40
  text "5V" at -586.11,-1770.67 h40
  text "CAN H" at 637.8,-1776.57 h40
  text "Vin" at 1179.13,-1777.56 h40
  text "Servo3" at -2531.5,-1843.5 h40
  text "Servo5" at -746.06,-1875 h40
  text "M3" at 2544.29,-1880.91 h60
  text "5V" at 214.57,-1923.23 h60

## Text inside footprints (layer, text, board x,y; h text height)
BRD: Top Overlay "SDO" at 325.16,-538.31 h40 r90; Top Overlay "LED" at 225.16,-538.31 h40 r90; Top Overlay "SCK" at 125.16,-538.31 h40 r90; Top Overlay "SDI" at 25.16,-538.31 h40 r90; Top Overlay "D/C" at -74.84,-538.31 h40 r90; Top Overlay "RESET" at -174.84,-538.31 h40 r90; Top Overlay "CS" at -274.84,-538.31 h40 r90; Top Overlay "GND" at -374.84,-538.31 h40 r90; Top Overlay "Vcc" at -474.84,-538.31 h40 r90; Bottom Overlay "GND" at -375.48,-428.28 h40 r90; Bottom Overlay "SDI" at 24.52,-441.61 h40 r90; Bottom Overlay "RESET" at -175.48,-348.31 h40 r90; Bottom Overlay "CS" at -275.48,-468.27 h40 r90; Bottom Overlay "SCK" at 124.52,-428.28 h40 r90; Bottom Overlay "D/C" at -75.48,-428.28 h40 r90; Bottom Overlay "SDO" at 324.52,-428.28 h40 r90; Bottom Overlay "LED" at 224.52,-428.28 h40 r90; Bottom Overlay "Vcc" at -475.48,-428.28 h40 r90
BRD1: Top Overlay "A11" at 1342.05,66.67 h40 r90; Top Overlay "A10" at 1247.05,53.34 h40 r90; Top Overlay "AREF" at 1142.05,6.69 h40 r90; Top Overlay "VUSB" at 987.05,6.69 h40 r90; Top Overlay "Vin" at 842.05,376.69 h40 r90; Top Overlay "AGND" at 942.05,376.69 h40 r90; Top Overlay "3.3V" at 1042.05,376.69 h40 r90; Top Overlay "23 A9" at 1142.05,376.69 h40 r90; Top Overlay "22 A8" at 1242.05,376.69 h40 r90; Top Overlay "21 A7" at 1342.05,376.69 h40 r90; Top Overlay "20 A6" at 1442.05,376.69 h40 r90; Top Overlay "19 SCL" at 1542.05,376.69 h40 r90; Top Overlay "18 SDA" at 1642.05,376.69 h40 r90; Top Overlay "17 A3" at 1742.05,376.69 h40 r90; Top Overlay "16 A2" at 1842.05,376.69 h40 r90; Top Overlay "15 A1" at 1942.05,376.69 h40 r90; Top Overlay "14 A0" at 2042.05,376.69 h40 r90; Top Overlay "13 SCK" at 2142.05,376.69 h40 r90; Top Overlay "Program" at 2463.67,122.94 h40 r180; Top Overlay "GND" at 2303.72,24.19 h40 r180; Top Overlay "3.3V" at 2337.05,-74.56 h40 r180; Top Overlay "VBat" at 2330.38,-173.31 h40 r180; Top Overlay "SDO 11" at 2042.05,-573.3 h40 r90; Top Overlay "SDI 12" at 2142.05,-579.97 h40 r90; Top Overlay "RX2 9" at 1842.05,-553.31 h40 r90; Top Overlay "TX2 10" at 1942.05,-586.63 h40 r90; Top Overlay "TX3 8" at 1742.05,-553.31 h40 r90; Top Overlay "RX3 7" at 1642.05,-553.31 h40 r90; Top Overlay "6" at 1542.05,-393.36 h40 r90; Top Overlay "5" at 1442.05,-393.36 h40 r90; Top Overlay "CANRX 4" at 1342.05,-633.28 h40 r90; Top Overlay "CANTX 3" at 1242.05,-633.28 h40 r90; Top Overlay "2" at 1142.05,-393.36 h40 r90; Top Overlay "TX1 1" at 1042.05,-543.31 h40 r90; Top Overlay "RX1 0" at 942.05,-546.64 h40 r90; Top Overlay "GND" at 842.05,-473.33 h40 r90; Top Overlay "USB" at 872.05,-73.31 h60 r90; Bottom Overlay "USB" at 872.05,86.69 h60 r90; Bottom Overlay "VUSB" at 987.05,158.31 h40 r90; Bottom Overlay "AREF" at 1142.05,158.31 h40 r90; Bottom Overlay "A10" at 1247.05,158.31 h40 r90; Bottom Overlay "A11" at 1342.05,158.31 h40 r90; Bottom Overlay "CANTX 3" at 1247.05,-371.7 h40 r90; Bottom Overlay "CANRX 4" at 1347.05,-371.7 h40 r90; Bottom Overlay "GND" at 847.05,-371.7 h40 r90; Bottom Overlay "RX1 0" at 947.05,-371.7 h40 r90; Bottom Overlay "RX3 7" at 1647.05,-371.7 h40 r90; Bottom Overlay "TX3 8" at 1747.05,-371.7 h40 r90; Bottom Overlay "SDI 12" at 2147.05,-371.7 h40 r90; Bottom Overlay "SDO 11" at 2047.05,-371.7 h40 r90; Bottom Overlay "TX1 1" at 1047.05,-371.7 h40 r90; Bottom Overlay "RX2 9" at 1847.05,-371.7 h40 r90; Bottom Overlay "TX2 10" at 1947.05,-371.7 h40 r90; Bottom Overlay "2" at 1147.05,-371.7 h40 r90; Bottom Overlay "5" at 1447.05,-371.7 h40 r90; Bottom Overlay "6" at 1547.05,-371.7 h40 r90; Bottom Overlay "Program" at 2200.42,127.93 h40 r180; Bottom Overlay "A14" at 1963.58,227.36 h40 r180; Bottom Overlay "VBat" at 2200.42,-168.32 h40 r180; Bottom Overlay "GND" at 2200.42,29.18 h40 r180; Bottom Overlay "3.3V" at 2200.42,-69.57 h40 r180; Bottom Overlay "22 A8" at 1237.05,578.3 h40 r90; Bottom Overlay "20 A6" at 1437.05,578.3 h40 r90; Bottom Overlay "18 SDA" at 1637.05,611.62 h40 r90; Bottom Overlay "13 SCK" at 2137.05,611.62 h40 r90; Bottom Overlay "23 A9" at 1137.05,578.3 h40 r90; Bottom Overlay "19 SCL" at 1537.05,611.62 h40 r90; Bottom Overlay "16 A2" at 1837.05,571.63 h40 r90; Bottom Overlay "Vin" at 837.05,491.66 h40 r90; Bottom Overlay "3.3V" at 1037.05,531.65 h40 r90; Bottom Overlay "AGND" at 937.05,538.31 h40 r90; Bottom Overlay "21 A7" at 1337.05,571.63 h40 r90; Bottom Overlay "17 A3" at 1737.05,571.63 h40 r90; Bottom Overlay "14 A0" at 2037.05,571.63 h40 r90; Bottom Overlay "15 A1" at 1937.05,558.31 h40 r90
BRD2: Top Overlay "3.3V" at -1164.13,1737.64 h30 r90; Top Overlay "EN" at -1264.13,1742.64 h30 r90; Top Overlay "VBAT" at -1364.13,1737.64 h30 r90; Top Overlay "FIX" at -1464.13,1737.64 h30 r90; Top Overlay "TX" at -1564.13,1737.64 h30 r90; Top Overlay "RX" at -1664.13,1742.64 h30 r90; Top Overlay "GND" at -1764.13,1737.64 h30 r90; Top Overlay "Vin" at -1864.13,1737.64 h30 r90; Top Overlay "PPS" at -1964.13,1737.64 h30 r90; Bottom Overlay "PPS" at -1964.13,1812.61 h30 r90; Bottom Overlay "RX" at -1664.13,1782.62 h30 r90; Bottom Overlay "TX" at -1564.13,1782.62 h30 r90; Bottom Overlay "EN" at -1264.13,1782.62 h30 r90; Bottom Overlay "3.3V" at -1164.13,1837.6 h30 r90; Bottom Overlay "Vin" at -1864.13,1807.61 h30 r90; Bottom Overlay "GND" at -1764.13,1812.61 h30 r90; Bottom Overlay "FIX" at -1464.13,1807.61 h30 r90; Bottom Overlay "VBAT" at -1364.13,1842.6 h30 r90
BRD3: Top Overlay "PS0" at -852.36,-17.72 h40; Top Overlay "PS1" at -839.03,-117.72 h40; Top Overlay "ADR" at -852.36,-323.82 h40; Top Overlay "INT" at -845.7,-217.72 h40; Top Overlay "3Vo" at -1848.82,-17.72 h40; Top Overlay "Vin" at -1848.82,82.28 h40; Top Overlay "GND" at -1848.82,-117.72 h40; Top Overlay "SDA" at -1848.82,-217.72 h40; Top Overlay "SCL" at -1848.82,-317.72 h40; Top Overlay "RST" at -1848.82,-417.72 h40; Top Overlay "BNO055 Board" at -1598.82,107.28 h40 r270; Bottom Overlay "PS0" at -798.82,-17.72 h40; Bottom Overlay "PS1" at -798.82,-117.72 h40; Bottom Overlay "ADR" at -798.82,-317.72 h40; Bottom Overlay "INT" at -798.82,-217.72 h40; Bottom Overlay "3Vo" at -1748.82,-17.72 h40; Bottom Overlay "Vin" at -1748.82,82.28 h40; Bottom Overlay "GND" at -1748.82,-117.72 h40; Bottom Overlay "SDA" at -1748.82,-217.72 h40; Bottom Overlay "SCL" at -1748.82,-317.72 h40; Bottom Overlay "RST" at -1748.82,-417.72 h40; Bottom Overlay "BNO055 Board" at -1598.82,-392.72 h40 r270
BRD4: Top Overlay "SCL" at -2137.2,-674.29 h40 r90; Top Overlay "SDA" at -2237.2,-674.29 h40 r90; Top Overlay "3.3V" at -2337.2,-699.29 h40 r90; Top Overlay "GND" at -2437.2,-674.29 h40 r90; Top Overlay "HMC6343" at -1912.2,-299.29 h40 r90; Bottom Overlay "GND" at -2437.2,-339.29 h40 r90; Bottom Overlay "SCL" at -2142.2,-339.29 h40 r90; Bottom Overlay "3.3V" at -2337.2,-299.29 h40 r90; Bottom Overlay "SDA" at -2237.2,-339.29 h40 r90
BRD5: Top Overlay "RFduino" at -935.04,-1546.65 h40 r90; Top Overlay "GPIO6" at -1310.04,-896.65 h40 r90; Top Overlay "GPIO5" at -1210.04,-896.65 h40 r90; Top Overlay "GPIO4" at -1110.04,-896.65 h40 r90; Top Overlay "GPI03" at -1010.04,-896.65 h40 r90; Top Overlay "GPIO2" at -910.04,-896.65 h40 r90; Top Overlay "GPIO1" at -910.04,-2021.65 h40 r90; Top Overlay "RESET" at -1210.04,-2021.65 h40 r90; Top Overlay "GPIO0" at -1010.04,-2021.65 h40 r90; Top Overlay "+3.3V" at -1310.04,-2021.65 h40 r90; Top Overlay "GND" at -1510.04,-1946.65 h40 r90; Bottom Overlay "GPIO6" at -1310.04,-1041.71 h40 r90; Bottom Overlay "GPIO2" at -910.04,-1041.71 h40 r90; Bottom Overlay "GPI03" at -1010.04,-1041.71 h40 r90; Bottom Overlay "GPIO5" at -1210.04,-1041.71 h40 r90; Bottom Overlay "GPIO4" at -1110.04,-1041.71 h40 r90; Bottom Overlay "+3.3V" at -1310.04,-1541.71 h40 r90; Bottom Overlay "GPIO1" at -910.04,-1555.04 h40 r90; Bottom Overlay "GPIO0" at -1010.04,-1541.71 h40 r90; Bottom Overlay "GND" at -1510.04,-1615.02 h40 r90; Bottom Overlay "RESET" at -1210.04,-1535.05 h40 r90
BRD6: Top Overlay "GND" at 1673.62,1920.04 h30; Top Overlay "GPIO2" at 1668.62,1820.04 h30; Top Overlay "GPIO0" at 1668.62,1720.04 h30; Top Overlay "RX" at 1668.62,1620.04 h30; Top Overlay "3.3V" at 1368.62,1620.04 h30; Top Overlay "RST" at 1393.61,1720.04 h30; Top Overlay "EN" at 1423.6,1820.04 h30; Top Overlay "TX" at 1423.6,1915.04 h30; Bottom Overlay "GPIO2" at 1803.58,1820.04 h30; Bottom Overlay "GPIO0" at 1803.58,1720.04 h30; Bottom Overlay "GND" at 1748.6,1920.04 h30; Bottom Overlay "RX" at 1718.61,1620.04 h30; Bottom Overlay "TX" at 1473.59,1915.04 h30; Bottom Overlay "EN" at 1473.59,1820.04 h30; Bottom Overlay "RST" at 1473.59,1720.04 h30; Bottom Overlay "3.3V" at 1473.59,1620.04 h30
BRD7: Top Overlay "Vin" at 984.06,843.11 h30 r90; Top Overlay "3V" at 1134.06,868.11 h40 r90; Top Overlay "GND" at 1234.06,868.11 h40 r90; Top Overlay "T" at 1334.06,868.11 h40 r90; Top Overlay "Z" at 1434.06,868.11 h40 r90; Top Overlay "Y" at 1534.06,868.11 h40 r90; Top Overlay "X" at 1634.06,868.11 h40 r90
C2: Top Overlay "-" at 2123.35,-848.39 h40 r90; Top Overlay "+" at 2123.35,-1303.39 h40 r90; Bottom Overlay "+" at 2123.35,-1243.39 h40 r90; Bottom Overlay "-" at 2123.35,-923.39 h40 r90
C3: Top Overlay "-" at 2586.93,-848.39 h40 r90; Top Overlay "+" at 2586.93,-1303.39 h40 r90; Bottom Overlay "+" at 2586.93,-1243.39 h40 r90; Bottom Overlay "-" at 2586.93,-923.39 h40 r90
C6: Top Overlay "-" at 2117.44,-1424.17 h40 r90; Top Overlay "+" at 2117.44,-1879.17 h40 r90; Bottom Overlay "+" at 2117.44,-1819.17 h40 r90; Bottom Overlay "-" at 2117.44,-1499.17 h40 r90
J1: Top Overlay "1" at 1079.02,-1921.34 h60; Top Overlay "3" at 1079.02,-1431.34 h60; Top Overlay "4" at 889.02,-1431.34 h60; Top Overlay "2" at 889.02,-1921.34 h60
J2: Top Overlay "1" at -2320.59,-1389.84 h60; Top Overlay "3" at -2320.59,-899.84 h60; Top Overlay "4" at -2510.59,-899.84 h60; Top Overlay "2" at -2510.59,-1389.84 h60
J3: Top Overlay "2" at -2062.13,1844.88 h60 r270; Top Overlay "1" at -2267.13,1844.88 h60 r270
U2: Top Overlay "GND" at 1616.98,-1956.85 h40; Top Overlay "5V" at 1752.98,-1933.85 h40; Top Overlay "TAB" at 1606.98,-1734.85 h40; Top Overlay "Vin" at 1470.98,-1932.85 h40
U3: Top Overlay "GND" at 2053,1240 h40; Top Overlay "3.3V" at 2189,1263 h40; Top Overlay "TAB" at 2043,1462 h40; Top Overlay "5V" at 1943.9,1265.75 h40